# Altium PCB OpAmpPCB1.PcbDoc
Units mm, origin at the board's own origin, x right, y up, seen from the top; angles counter-clockwise.
Board outline 30 x 20 mm, 2 copper layers (Top Layer, Bottom Layer); 27 components, 12 nets, 60 pads, 0 vias.
Unrouted connection lines stored in the file: 12.
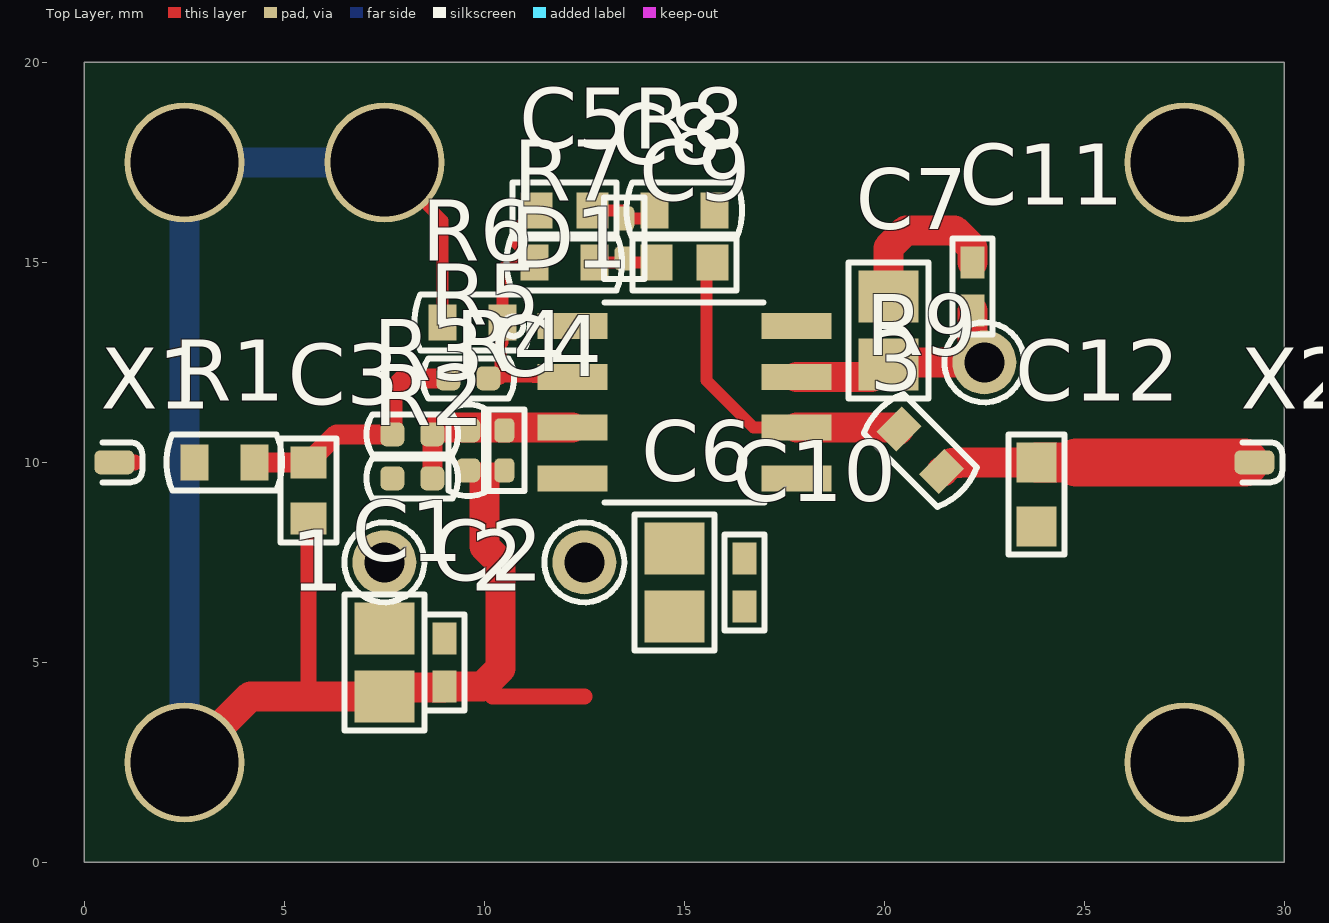
[diagram p0: Top Layer view]
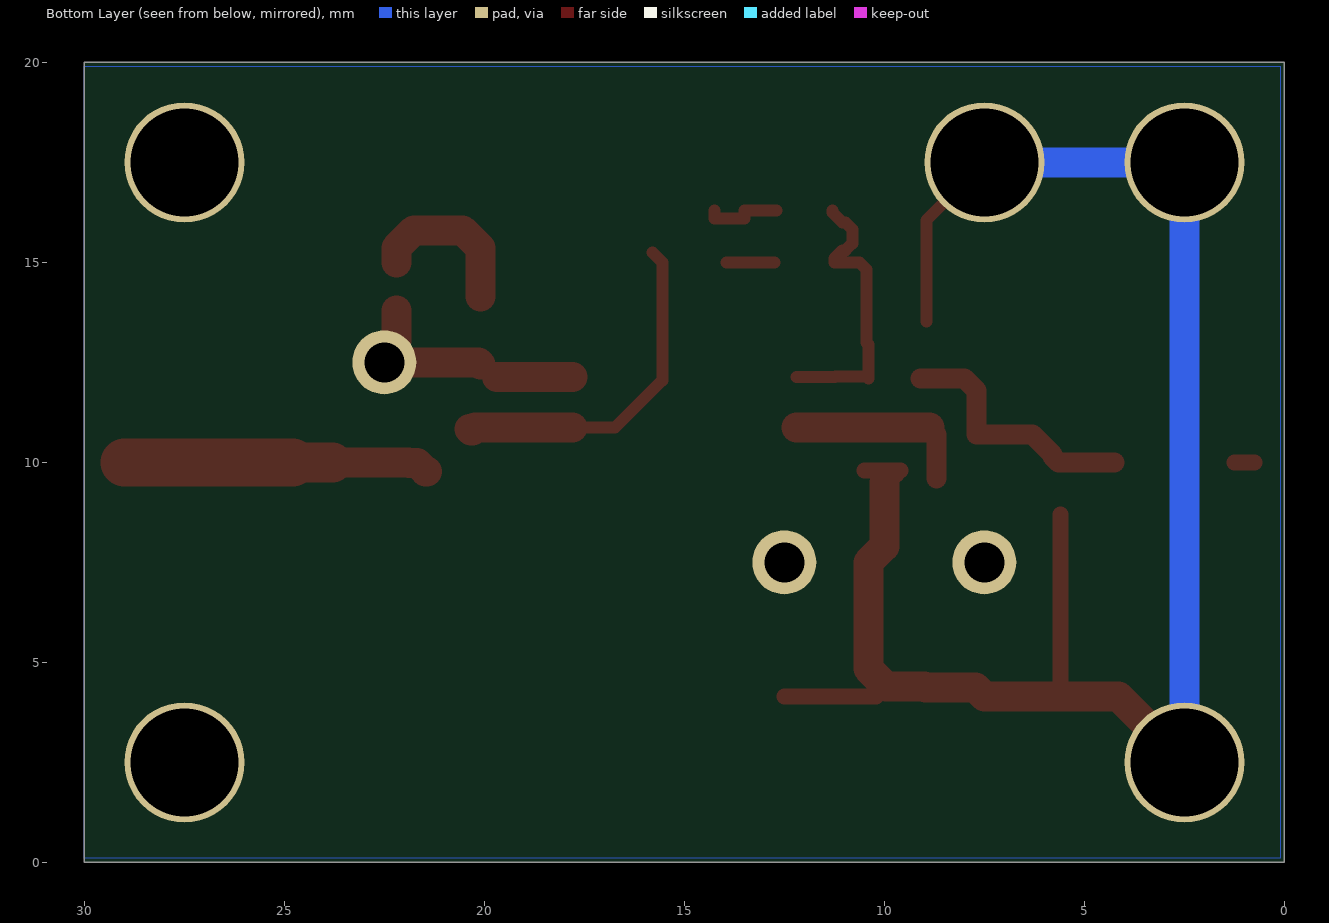
[diagram p1: Bottom Layer view, seen from below]

## Layer stack, top to bottom
Top Solder: solder mask 0.0102, Solder Resist, Dk 3.5
Top Layer: signal copper 0.0356
Dielectric 1: dielectric 0.32, FR-4, Dk 4.8
Bottom Layer: signal copper 0.0356
Bottom Solder: solder mask 0.0102, Solder Resist, Dk 3.5

## Board outline
0,0 0,20 30,20 30,0

## Design rules (kind name [scope] priority, off if disabled: settings)
AssemblyTestPointUsage AssemblyTestPointUsage_1 [All] p2:
AssemblyTestpoint AssemblyTestpoint_1 [All] p2: testpointundercomponent=TRUE minsize=1.016 maxsize=2.54 preferedsize=1.524 minholesize=0 maxholesize=1.016 preferedholesize=0.813 testpointgrid=0.025 usegrid=TRUE gridtolerance=0 allowsidetop=TRUE allowsidebottom=TRUE
Clearance [All] p1: gap=0.254 ignorepadtopadclearanceinfootprint=FALSE except(0: Arc-Hole Track-Hole SMDPad-Hole THPad-Hole Via-Hole Fill-Hole Poly-Hole Region-Hole Text-Hole)
Clearance Clearance_1 [All] p2: gap=0.254 ignorepadtopadclearanceinfootprint=FALSE except(0: Arc-Hole Track-Hole SMDPad-Hole THPad-Hole Via-Hole Fill-Hole Poly-Hole Region-Hole Text-Hole; 0.1: SMDPad-Poly SMDPad-Region THPad-Poly THPad-Region; 0.15: Track-Track Track-SMDPad SMDPad-SMDPad SMDPad-THPad SMDPad-Via THPad-THPad)
ComponentClearance ComponentClearance_1 [All] p2: gap=0.254 collisioncheckmode=3 verticalgap=0.254 showdistances=FALSE
DiffPairsRouting [All] p1: maxlimit=0.254 minlimit=0.254 mostfreqgap=0.254 substack1={E3139BEB-1D26-4D56-B641-86937DF22D5B} toplayer_{e3139beb-1d26-4d56-b641-86937df22d5b}_minwidth=0.381 toplayer_{e3139beb-1d26-4d56-b641-86937df22d5b}_maxwidth=0.381 toplayer_{e3139beb-1d26-4d56-b641-86937df22d5b}_prefwidth=0.381 bottomlayer_{e3139beb-1d26-4d56-b641-86937df22d5b}_minwidth=0.381 bottomlayer_{e3139beb-1d26-4d56-b641-86937df22d5b}_maxwidth=0.381 bottomlayer_{e3139beb-1d26-4d56-b641-86937df22d5b}_prefwidth=0.381 toplayer_minwidth=0.381 toplayer_maxwidth=0.381 toplayer_prefwidth=0.381 bottomlayer_minwidth=0.381 bottomlayer_maxwidth=0.381 bottomlayer_prefwidth=0.381 maxuncoupledlength=12.7
DiffPairsRouting DiffPairsRouting_1 [All] p2: maxlimit=0.254 minlimit=0.254 mostfreqgap=0.254 substack1={E3139BEB-1D26-4D56-B641-86937DF22D5B} toplayer_{e3139beb-1d26-4d56-b641-86937df22d5b}_minwidth=0.381 toplayer_{e3139beb-1d26-4d56-b641-86937df22d5b}_maxwidth=0.381 toplayer_{e3139beb-1d26-4d56-b641-86937df22d5b}_prefwidth=0.381 bottomlayer_{e3139beb-1d26-4d56-b641-86937df22d5b}_minwidth=0.381 bottomlayer_{e3139beb-1d26-4d56-b641-86937df22d5b}_maxwidth=0.381 bottomlayer_{e3139beb-1d26-4d56-b641-86937df22d5b}_prefwidth=0.381 toplayer_minwidth=0.381 toplayer_maxwidth=0.381 toplayer_prefwidth=0.381 bottomlayer_minwidth=0.381 bottomlayer_maxwidth=0.381 bottomlayer_prefwidth=0.381 maxuncoupledlength=12.7
FabricationTestPointUsage FabricationTestPointUsage_1 [All] p2: valid=0 allowmultiple=FALSE
FabricationTestpoint FabricationTestpoint_1 [All] p2: side=3 testpointundercomponent=TRUE minsize=1.016 maxsize=2.54 preferedsize=1.524 minholesize=0 maxholesize=1.016 preferedholesize=0.813 testpointgrid=0.025 allowsidetop=TRUE allowsidebottom=TRUE usegrid=TRUE gridtolerance=0
FanoutControl Fanout_LCC [IsLCC] p1: bgadir=Out bgaviamode=Centered fanoutstyle=Auto fanoutdirection=Alternating viagrid=0.025 // Fanout_LCC (Default Rule)
FanoutControl Fanout_BGA [IsBGA] p2: bgadir=Out bgaviamode=Centered fanoutstyle=Auto fanoutdirection=Alternating viagrid=0.025 // Fanout_BGA (Default Rule)
FanoutControl Fanout_Small [(CompPinCount < 5)] p3: bgadir=Out bgaviamode=Centered fanoutstyle=Auto fanoutdirection=OutThenIn viagrid=0.025 // Fanout_Small (Default Rule)
FanoutControl Fanout_SOIC [IsSOIC] p4: bgadir=Out bgaviamode=Centered fanoutstyle=Auto fanoutdirection=Alternating viagrid=0.025 // Fanout_SOIC (Default Rule)
FanoutControl Fanout_BGA_1 [IsBGA] p6: bgadir=Out bgaviamode=Centered fanoutstyle=Auto fanoutdirection=Alternating viagrid=0.025 // Fanout_BGA (Default Rule)
FanoutControl Fanout_LCC_1 [IsLCC] p7: bgadir=Out bgaviamode=Centered fanoutstyle=Auto fanoutdirection=Alternating viagrid=0.025 // Fanout_LCC (Default Rule)
FanoutControl Fanout_SOIC_1 [IsSOIC] p8: bgadir=Out bgaviamode=Centered fanoutstyle=Auto fanoutdirection=Alternating viagrid=0.025 // Fanout_SOIC (Default Rule)
FanoutControl Fanout_Small_1 [(CompPinCount < 5)] p9: bgadir=Out bgaviamode=Centered fanoutstyle=Auto fanoutdirection=OutThenIn viagrid=0.025 // Fanout_Small (Default Rule)
FanoutControl Fanout_Default_1 [All] p10: bgadir=Out bgaviamode=Centered fanoutstyle=Auto fanoutdirection=Alternating viagrid=0.025 // Fanout_Default (Default Rule)
Height Height_1 [All] p2: minheight=0 maxheight=25.4 prefheight=12.7
HoleSize HoleSize_1 [All] p2: absolutevalues=TRUE maxlimit=2.54 minlimit=0.025 maxpercent=80.000 minpercent=20.000
HoleToHoleClearance HoleToHoleClearance_1 [All] p2: gap=0.254 allowstackedmicrovias=TRUE
LayerPairs LayerPairs_1 [All] p2: enforce=TRUE
MinimumSolderMaskSliver MinimumSolderMaskSliver_1 [All] p2: minsoldermaskwidth=0.254
NetAntennae NetAntennae_1 [All] p2: netantennaetolerance=0
PasteMaskExpansion PasteMaskExpansion_1 [All] p2: expansion=0
PlaneClearance PlaneClearance_1 [All] p2: clearance=0.8
PlaneConnect PlaneConnect_1 [All] p2: planeconnectstyle=Direct reliefexpansion=0.508 reliefentries=4 reliefconductorwidth=0.254 reliefairgap=0.254
PolygonConnect [All] p1: connectstyle=Direct reliefconductorwidth=0.254 reliefentries=4 polygonreliefangle="90 Angle" airgapwidth=0.254
PolygonConnect PolygonConnect_1 [All] p2: connectstyle=Direct reliefconductorwidth=0.254 reliefentries=4 polygonreliefangle="90 Angle" airgapwidth=0.254
RoutingCorners RoutingCorners_1 [All] p2: cornerstyle=45-Degree minsetback=2.54 maxsetback=2.54
RoutingLayers RoutingLayers_1 [All] p2: top layer_v5=TRUE bottom layer_v5=TRUE
RoutingPriority RoutingPriority_1 [All] p2: routingpriority=0
RoutingTopology RoutingTopology_1 [All] p2: topology=Shortest
RoutingVias [All] p1: holewidth=0.711 width=1.27 viastyle="Through Hole" minholewidth=0.711 minwidth=1.27 maxholewidth=0.711 maxwidth=1.27
RoutingVias RoutingVias_1 [All] p2: holewidth=0.711 width=1.27 viastyle="Through Hole" minholewidth=0.711 minwidth=1.27 maxholewidth=0.711 maxwidth=1.27
ShortCircuit ShortCircuit_1 [All] p2: allowed=FALSE
SilkToBoardRegionClearance SilkToBoardRegionClearance_1 [All] p2:
SilkToSilkClearance SilkToSilkClearance_1 [All] p2: silktosilkclearance=0.254
SilkToSolderMaskClearance SilkToSolderMaskClearance_1 [IsPad] p2: minsilkscreentomaskgap=0.254 clearancetoexposedcopper=TRUE
SolderMaskExpansion [All] p1: expansion=0.102 istentingtop=FALSE
SolderMaskExpansion SolderMaskExpansion_1 [All] p2: expansion=0.102 istentingtop=FALSE
UnRoutedNet UnRoutedNet_1 [All] p2:
UnpouredPolygon UnpouredPolygon_1 [All] p2:
Width [All] p1: maxlimit=1.254 minlimit=0.254 preferedwidth=0.3 substack1={E3139BEB-1D26-4D56-B641-86937DF22D5B} toplayer_{e3139beb-1d26-4d56-b641-86937df22d5b}_maxwidth=0.254 toplayer_{e3139beb-1d26-4d56-b641-86937df22d5b}_prefwidth=0.254 bottomlayer_{e3139beb-1d26-4d56-b641-86937df22d5b}_maxwidth=0.254 bottomlayer_{e3139beb-1d26-4d56-b641-86937df22d5b}_prefwidth=0.254
Width Width_08 [All] p2 off: maxlimit=0.8 minlimit=0.8 preferedwidth=0.8 substack1={E3139BEB-1D26-4D56-B641-86937DF22D5B}
Width Width_1 [All] p3 off: maxlimit=0.254 minlimit=0.254 preferedwidth=0.254 substack1={E3139BEB-1D26-4D56-B641-86937DF22D5B} checkconnectedcopper=TRUE
25 further rules are at their usual default settings.

## Components (designator, comment, footprint, x,y, rotation, side; value= is the part's Value field where it differs from the comment)
1 "TP" TP1 7.5,7.5 r90 top
2 "TP" TP1 12.5,7.5 r90 top
3 "TP" TP1 22.5,12.5 r90 top
C1 "4,7 мк" CAPC2012N 7.5,5 r90 top value={Value}
C2 "100" CAPC1005N 9,5 r270 top value={Value}
C3 "10" CAPC1608L 5.6,9.3 r90 top value={Value}
C4 "0,1 мк" CAPC1005L 10.5,10.3 r90 top value=10
C5 "3000" CAPC1608L 12,16.3 r0 top value={Value}
C6 "4,7 мк" CAPC2012N 14.75,7 r90 top value={Value}
C7 "4,7 мк" CAPC2012N 20.1,13.3 r270 top value={Value}
C8 "10" CAPC1005L 13.5,15.6 r90 top
C9 "100" CAPC1608L 15,15 r0 top value={Value}
C10 "100" CAPC1005N 16.5,7 r270 top value={Value}
C11 "100" CAPC1005N 22.2,14.4 r90 top value={Value}
C12 "10" CAPC1608N 23.8,9.2 r90 top value={Value}
D1 "AD8675ARZ" SOIC127P600-8M 15,11.5 r0 top
R1 "1к" RESC1608L 3.5,10 r180 top value={Value}
R2 "10 к" RESC1005L 8.2,9.6 r0 top value={Value}
R3 "1 к" RESC1005L 8.2,10.7 r0 top value={Value}
R4 "10 к" RESC1005L 9.6,10.3 r90 top value={Value}
R5 "1 к" RESC1005L 9.6,12.1 r0 top value={Value}
R6 "1к" RESC1608L 9.7,13.5 r180 top value={Value}
R7 "9,2 к" RESC1608L 12,15 r0 top value={Value}
R8 "9,2 к" RESC1608L 15,16.3 r0 top value={Value}
R9 "1к" RESC1608L 20.9,10.3 r135 top value={Value}
X1 "СРГ-50-751ФВ" TP0.6X1 0.75,10 r0 top
X2 "СРГ-50-751ФВ" TP0.6X1 29.25,10 r0 top

## Footprints (in the part's own frame and the unit in brackets; to place one, negate y for a bottom-side part, rotate by r counter-clockwise, add the part's x,y. Pads: shape width x height; smd on the part's side, far side on the other; paste and mask are expansions set on the pad)
CAPC1005L [mm] "Chip Capacitor, Body 1.0x0.5mm, IPC High Density"
  rrect50% 0.6x0.5 smd: 1(-0.5,0) 2(0.5,0)
  Top Layer pour cut-out: -0.2,0.5 -0.2,-0.5 0.2,-0.5 0.2,0.5
  silkscreen extent -1.02,-0.51 1.02,0.51, body extent -0.55,-0.3 0.55,0.3, height 0.6
CAPC1005N [mm] "Chip Capacitor, Body 1.0x0.5mm, IPC Medium Density"
  rect 0.8x0.6 smd: 1(-0.6,0) 2(0.6,0)
  Top Layer pour cut-out: -0.2,0.5 -0.2,-0.5 0.2,-0.5 0.2,0.5
  silkscreen extent -1.2,-0.5 1.2,0.5, body extent -0.55,-0.3 0.55,0.3, height 0.6
CAPC1608L [mm] "Chip Capacitor, Body 1.6x0.8mm, IPC High Density"
  rect 0.8x0.9 smd: 1(-0.7,0) 2(0.7,0)
  Top Layer pour cut-out: -0.3,0.7 -0.3,-0.7 0.3,-0.7 0.3,0.7
  silkscreen extent -1.3,-0.7 1.3,0.7, body extent -0.87,-0.48 0.87,0.48, height 0.85
CAPC1608N [mm] "Chip Capacitor, Body 1.6x0.8mm, IPC Medium Density"
  rect 1x1 smd: 1(-0.8,0) 2(0.8,0)
  Top Layer pour cut-out: -0.3,0.7 -0.3,-0.7 0.3,-0.7 0.3,0.7
  silkscreen extent -1.5,-0.7 1.5,0.7, body extent -0.87,-0.48 0.87,0.48, height 0.85
CAPC2012N [mm] "Chip Capacitor, Body 2.0x1.3mm, IPC Medium Density"
  rect 1.3x1.5 smd: 1(-0.85,0) 2(0.85,0)
  Top Layer pour cut-out: -0.2,1 -0.2,-1 0.2,-1 0.2,1
  silkscreen extent -1.7,-1 1.7,1, body extent -1.1,-0.72 1.1,0.72, height 1.1
RESC1005L [mm] "Chip Resistor, Body 1.1x0.5mm, IPC High Density"
  rrect50% 0.6x0.6 smd: 1(-0.5,0) 2(0.5,0)
  Top Layer pour cut-out: -0.2,0.5 -0.2,-0.5 0.2,-0.5 0.2,0.5
  silkscreen extent -1.15,-0.5 1.15,0.5, body extent -0.55,-0.3 0.55,0.3, height 0.4
RESC1608L [mm] "Chip Resistor, Body 1.6x0.8mm, IPC High Density"
  rect 0.7x0.9 smd: 1(-0.75,0) 2(0.75,0)
  Top Layer pour cut-out: -0.4,0.7 -0.4,-0.7 0.4,-0.7 0.4,0.7
  silkscreen extent -1.45,-0.7 1.45,0.7, body extent -0.85,-0.48 0.85,0.48, height 0.6
SOIC127P600-8M [mm] "SOIC, 8-Leads, Body 4.9x3.9mm, Pitch 1.27mm, IPC Low Density"
  rect 1.75x0.65 smd: 1(-2.8,1.905) 2(-2.8,0.635) 3(-2.8,-0.635) 4(-2.8,-1.905) 5(2.8,-1.905) 6(2.8,-0.635) 7(2.8,0.635) 8(2.8,1.905)
  silkscreen extent -4.52,-2.5 2,2.5, body extent -3,-2.54 3,2.54, height 1.7
TP0.6X1 [mm] "Точка пайки переход СРГ-50-751 (плата заштифтована)"
  rrect50% 1x0.6 smd paste-25.4: 1(0,0)
  silkscreen extent -0.3,-0.5 0.7,0.5
TP1 [mm] "Test point 1x1.6"
  round 1.6 hole 1 paste+0: 1(0,0)
  silkscreen extent -1,-1 1,1

## Part data
1 2 3: "Test point"
C1 C6 C7: library part C0805, "Чип-конденсатор", Power/Voltage={Voltage}, Tolerance={Tolerance}, Name=0805, TKE/TKC={TKE/TKC}, Type=Конденсатор
C2 C4 C8 C10 C11: library part C0402, "Чип-конденсатор", Power/Voltage={Voltage}, Tolerance={Tolerance}, Name=0402, TKE/TKC={TKE/TKC}, Type=Конденсатор
C3 C5 C9 C12: library part C0603, "Чип-конденсатор", Power/Voltage={Voltage}, Tolerance={Tolerance}, Name=0603, TKE/TKC={TKE/TKC}, Type=Конденсатор
D1: "36 V Precision, 2.8 nV/√Hz  Rail-to-Rail Output Op Amp", Manufacturer="Analog Devices", Package=R-8, ManufacturerPartNumber=AD8675ARZ, Type=Микросхема
R1 R6 R7 R8 R9: library part R0603, "Чип-резистор", Tolerance={Tolerance}, Name=0603, Type=Резистор
R2 R3 R4 R5: library part R0402, "Чип-резистор", Tolerance={Tolerance}, Name=0402, Type=Резистор
X1 X2: "Переход", ManufacturerPartNumber=СРГ-50-751ФВ, TU/GOST="ВР0.364.049 ТУ", Type=Переход

## Free pads (board coordinates)
  round 3 hole 2.7: 0(2.5,17.5) 1(2.5,2.5) 5(27.5,17.5) 6(7.5,17.5) 7(27.5,2.5)

## Nets (pads, with @x,y where several pads share a name; then routed paths per layer and width w, separated by ;. In a path a pad name is that pad's centre, name@x,y a point inside that pad or via, vN(x,y) a via of type N, cw(c..) or ccw(c..) an arc to the next point about the centre after c; other vN are vias at no path point)
GND: C1.1 C2.2 C3.1 C4.1 C6.1 C7.1 C10.2 C11.2 C12.1 pad.0 pad.1 pad.5 pad.6 pad.7 R4.1 R6.2 | length 51
  Top Layer w0.3: pad.6 8.95,16.05 R6.2@8.95,13.52
  Top Layer w0.4: 5.4,4.15 5.6,4.35 C3.1@5.6,8.7 ; 9.961,4.4 10.211,4.15 12.5,4.15 ; 10,9.5 9.8,9.7 9.7,9.7 R4.1 9.8,9.8 10,9.8 C4.1
  Top Layer w0.75: pad.1 4.15,4.15 5.4,4.15 C1.1 7.725,4.375 8.975,4.375 C2.2 9.961,4.4 10.4,4.839 10.4,7.5 10,7.9 10,9.5 ; C7.1 20.1,15.361 20.539,15.8 21.761,15.8 22.2,15.361 C11.2
  Bottom Layer w0.75: pad.1 pad.0 pad.6
Net1_1: 1.1 C1.2 C2.1 R2.1
Net2_1: 2.1 C6.2 C10.1 D1.4
Net3_1: 3.1 C7.2 C11.1 D1.7 | length 5.7
  Top Layer w0.75: D1.7 C7.2@19.685,12.135 ; C7.2 20.15,12.5 3.1 22.5,12.73 22.2,13.03 C11.1
NetC3_2: C3.2 R1.1 R3.1 R5.1 | length 6.4
  Top Layer w0.5: R1.1 C3.2 5.65,10 5.8,10.15 5.8,10.2 6.3,10.7 R3.1 7.7,11.8 8,12.1 R5.1
NetC4_2: C4.2 D1.3 R2.2 R3.2 R4.2 | length 4.7
  Top Layer w0.5: R2.2 R3.2 R3.2@8.865,10.865
  Top Layer w0.75: R3.2@8.865,10.865 D1.3
NetC5_1: C5.1 D1.2 R5.2 R6.1 R7.1 | length 7.2
  Top Layer w0.3: R5.2@10.4,12.1 R5.2@10.4,12.149 ; C5.1 11.3,16.25 11.05,16 10.976,16 10.8,15.824 10.8,15.476 10.976,15.3 11.05,15.3 11.25,15.1 R7.1 10.626,15 10.45,14.824 10.45,12.994 10.4,12.944 R5.2@10.4,12.149 ; D1.2 11.231,12.135 11.217,12.149 R5.2@10.4,12.149
NetC5_2: C5.2 C8.2 R8.1 | length 2
  Top Layer w0.3: C5.2 13.5,16.3 C8.2 14.25,16.1 R8.1
NetC8_1: C8.1 C9.1 R7.2 | length 1.2
  Top Layer w0.3: R7.2 C9.1@13.95,15
NetC9_2: C9.2 D1.6 R8.2 R9.2 | length 8.7
  Top Layer w0.3: C9.2@15.8,15.25 15.55,15 15.55,12.05 16.735,10.865 D1.6
  Top Layer w0.75: D1.6 20.229,10.865 20.299,10.795 20.334,10.795 R9.2
NetC12_2: C12.2 R9.1 X2.1 | length 7.7
  Top Layer w0.75: R9.1 21.466,9.77 21.681,9.985 21.885,9.985 21.9,10 C12.2
  Top Layer w1: C12.2 24.8,10
  Top Layer w1.2: 24.8,10 X2.1@29,10
NetR1_2: R1.2 X1.1 | length 0.5
  Top Layer w0.4: X1.1 1.25,10
pads on no net: D1.1 D1.5 D1.8

## Polygon pours and split planes (outlines as drawn)
GND on Bottom Layer "Bottom Layer-No Net" (solid, shelved, pour order 6): 0.1,19.9 0.1,0.1 30,0.1 30,19.9

## Silkscreen, mask and mechanical layers (free items; w line width, h text height)
Top Solder:
  rectangle: 27,0 30,20
  rectangle: 2.5,15 10,20
  rectangle: 2.5,0 5.5,5.1
  rectangle: 24.5,0 27.5,5
  rectangle: 24.5,15 27.5,20
  rectangle: 0,0 3,20
Bottom Solder:
  rectangle: 0,0 30,20
Dimensions:
  lines w0.05: 0.1,0.1 0.1,19.9 44.9,19.9
Mechanical 3:
  lines w0.05: 0.1,0.1 0.1,19.9 44.9,19.9
Mechanical 4:
  lines w0.254: 0.1,0.1 0.1,19.9 29.9,19.9 29.9,0.1 0.1,0.1
Mechanical 5:
  circle w0.254: c17.5,2.5 r1.25
  circle w0.254: c22.5,17.5 r1.25
  circle w0.254: c27.5,2.5 r1.25
  circle w0.254: c27.5,7.5 r1.25
  circle w0.254: c27.5,12.5 r1.25
  circle w0.254: c27.5,17.5 r1.25
  circle w0.254: c22.5,2.5 r1.25
  circle w0.254: c22.5,7.5 r1.25
  circle w0.254: c22.5,12.5 r1.25
  circle w0.254: c7.5,17.5 r1.25
  circle w0.254: c7.5,12.5 r1.25
  circle w0.254: c2.5,12.5 r1.25
  circle w0.254: c2.5,7.5 r1.25
  circle w0.254: c7.5,7.5 r1.25
  circle w0.254: c7.5,2.5 r1.25
  circle w0.254: c12.5,17.5 r1.25
  circle w0.254: c17.5,17.5 r1.25
  circle w0.254: c12.5,2.5 r1.25
  circle w0.254: c12.5,7.5 r1.25
  circle w0.254: c12.5,12.5 r1.25
  circle w0.254: c17.5,7.5 r1.25
  circle w0.254: c17.5,12.5 r1.25
  circle w0.254: c2.5,17.5 r1.25
  circle w0.254: c2.5,2.5 r1.25